# Altium PCB LKS_Motor_0313.PcbDoc (part 4 of 4)
Units mil, origin at the board's own origin, x right, y up, seen from the top; angles counter-clockwise.
Board outline 4321.51 x 591.52 mil, 2 copper layers (Top Layer, Bottom Layer); 107 components, 73 nets, 326 pads, 213 vias.
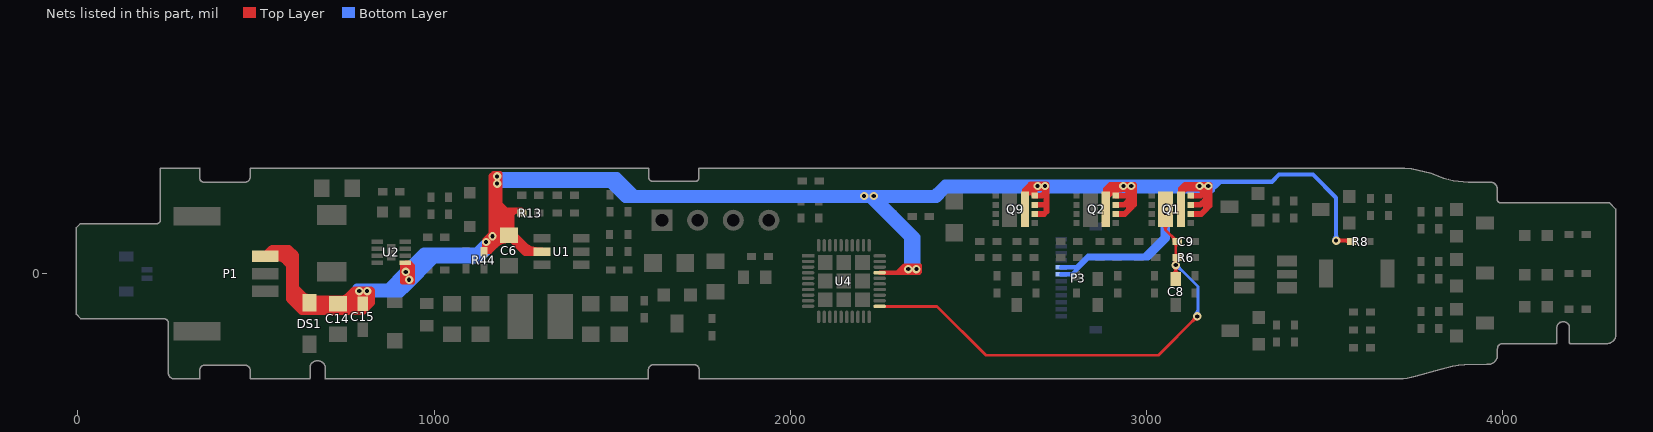
[diagram p4: the nets of this part, all layers, seen from the top]

## Via types
v1: diameter 25, hole 15, Top Layer to Bottom Layer, tented both sides, 139 vias
v2: diameter 23.62, hole 11.81, Top Layer to Bottom Layer, 74 vias

## Nets (pads, with @x,y where several pads share a name; then routed paths per layer and width w, separated by ;. In a path a pad name is that pad's centre, name@x,y a point inside that pad or via, vN(x,y) a via of type N, cw(c..) or ccw(c..) an arc to the next point about the centre after c; other vN are vias at no path point) (continued)
VBAT_8V4: C6.2 C14.2 C15.2 DS1.1 P1.1 Q1.2 Q1.3 Q1.4 Q1.9 Q2.2 Q2.3 Q2.4 Q2.9 Q9.2 Q9.3 Q9.4 Q9.9 R8.2 R13.1 R44.1 U1.5 U2.5 U4.27 | length 29490.6
  Top Layer w11.81: U2.5@919.37,29.37 U2.5@919.37,30.47 ; v2(920.37,5) 919.37,6 U2.5@919.37,30.47 ; v2(930,-17) 928,-15 911,-15 ; v2@1151.94,85.94 v2@1164,98 ; v2@1153.5,107.5 1159,113 1159,275 1164,280 ; v2@1161.28,95.28 v2@1169.5,103.5 ; v2@1169.5,112 1169.5,111.5 1140,82 R44.1@1140,61.56 ; 1169.5,118 1164,118 1140,94 R44.1@1140,74 ; v2(1177,273) 1177,111 v2@1169.5,103.5 ; 1181.63,201.37 1191,192 ; v2@1181.63,265.63 1181.63,232 ; v2@1181.63,268.37 1181.63,232 ; 1191,178 1186,183 1186,282 ; C6.2@1200,116.63 1200,162 1218,180 ; C6.2@1200,123 1192,131 1192,154 ; C6.2@1210,107.49 1203.49,107.49 1157.56,61.56 R44.1@1140,61.56 ; C6.2@1224.37,115.63 1220,120 1220,166 ; U4.27@2250.79,2.76 2310.76,2.76 ; 2298,3 2298,2.76 2299.76,2.76 2320,23 ; v2@2331,23 2319,11 ; 2345,23 v2@2337,15 ; Q1.4@3124,218.83 3151.83,218.83 ; v2(3532,93) 3573,93 R8.2@3576,90 ; 911,-24 ccw(c911,-9.47) 924.51,-14.82 cw(c911,-9.47) 911,-24 ; 911,-24 911,-15 ; 911,-24 941,-24 941,22 ; 911,-15 cw(c911,-35.88) 925.81,-21.16 ccw(c911,-35.88) 911,-15 ; 911,-15 911,-7 ; 911,-7 cw(c911,-20.39) v2@924.19,-18.04 ; 911,-7 cw(c911,-20.39) v2@924.19,-18.04 ; 911,-7 cw(c911,-20.39) v2@924.19,-18.04 ; 911,-7 cw(c911,-20.39) v2@924.19,-18.04 ; 911,-7 cw(c911,-20.39) v2@924.19,-18.04 ; 911,-7 cw(c911,-20.39) v2@924.19,-18.04 ; 911,-7 941,-7 ; 911,-7 911,22.1 ; 911,-7 v2@930,-7 ; 911,-7 v2@930,-7 ; 911,22.1 ccw(c922.31,22.1) 921.03,10.87 cw(c922.31,22.1) 911,22.1 ; 911,22.1 U2.5@919.37,30.47 ; U2.5@919.37,30.47 932.53,30.47 941,22 ; U2.5@919.37,30.47 930,19.84 v2@930,-7 ; v2@925.96,-12.69 ccw(c893.47,22) 941,22 ; v2@925.96,-12.69 ccw(c893.47,22) 941,22 ; v2@925.96,-12.69 ccw(c893.47,22) 941,22 ; v2@925.96,-12.69 ccw(c893.47,22) 941,22 ; 930,-2.74 ccw(c944.26,-2.74) 934.18,-12.82 cw(c944.26,-2.74) 930,-2.74 ; 930,-2.74 cw(c915.74,-2.74) 925.82,-12.82 ccw(c915.74,-2.74) 930,-2.74 ; v2@934.04,-21.31 ccw(c918.99,-5.25) 941,-5.25 ; v2@934.04,-21.31 ccw(c918.99,-5.25) 941,-5.25 ; v2@934.04,-21.31 ccw(c918.99,-5.25) 941,-5.25 ; v2@934.04,-21.31 ccw(c918.99,-5.25) 941,-5.25 ; 941,-7 cw(c941,7.93) 926.22,5.83 ccw(c941,7.93) 941,-7 ; 941,-7 941,22 ; R44.1@1140,61.56 1149.74,71.3 R44.1@1149.74,74 ; R44.1@1140,74 1181.63,115.63 ; R44.1@1140,74 R44.1@1149.74,74 ; v2@1146,94.91 ccw(c1146,111.58) 1157.79,99.79 cw(c1146,111.58) v2@1146,94.91 ; v2@1146,94.91 ccw(c1146,130.89) 1171.45,105.45 cw(c1146,130.89) v2@1146,94.91 ; R44.1@1149.74,74 1155,74 ; v2@1151.91,89 cw(c1192.72,89) 1163.86,117.86 ccw(c1192.72,89) v2@1151.91,89 ; v2@1151.91,89 cw(c1163.75,89) 1155.37,97.37 ccw(c1163.75,89) v2@1151.91,89 ; 1155,74 ccw(c1155,63.02) 1144.07,64.14 cw(c1155,63.02) 1155,74 ; 1155,74 cw(c1141.9,87.1) 1140.34,68.64 ccw(c1141.9,87.1) 1155,74 ; 1155,74 C6.2@1191.37,110.37 ; v2@1158.09,105 cw(c1146.25,105) 1154.63,96.63 ccw(c1146.25,105) v2@1158.09,105 ; v2@1158.09,105 cw(c1126.94,105) 1148.97,82.97 ccw(c1126.94,105) v2@1158.09,105 ; v2@1159.82,109.18 ccw(c1149.74,119.26) 1164,119.26 ; v2@1159.82,109.18 ccw(c1136.46,132.54) 1169.5,132.54 cw(c1136.46,132.54) v2@1159.82,109.18 ; v2@1159.82,109.18 ccw(c1118.36,150.64) 1177,150.64 cw(c1118.36,150.64) v2@1159.82,109.18 ; v2@1159.82,109.18 ccw(c1149.74,119.26) 1164,119.26 ; v2@1164,98 cw(c1153.33,108.66) 1148.06,94.53 ccw(c1153.33,108.66) v2@1164,98 ; v2@1164,98 1164,271 ; 1164,119.26 ccw(c1178.26,119.26) v2@1168.18,109.18 ; 1164,119.26 ccw(c1178.26,119.26) v2@1168.18,109.18 ; 1164,271 1164,280 ; 1164,271 v2@1175,282 ; 1164,271 v2@1175,282 ; 1164,280 1166,282 v2@1175,282 ; v2@1168.18,109.18 cw(c1190.33,131.33) 1159,131.33 ccw(c1190.33,131.33) v2@1168.18,109.18 ; v2@1169.5,103.5 cw(c1148.53,124.46) 1146.42,94.89 ccw(c1148.53,124.46) v2@1169.5,103.5 ; v2@1169.5,103.5 v2@1169.5,276.5 ; v2@1169.5,276.5 ccw(c1190.89,276.5) 1180.01,258.08 cw(c1190.89,276.5) v2@1169.5,276.5 ; v2@1169.5,276.5 v2@1175,282 ; v2@1172.82,248.82 cw(c1162.74,238.74) 1177,238.74 ; v2@1172.82,248.82 cw(c1141.01,217.01) 1186,217.01 ccw(c1141.01,217.01) v2@1172.82,248.82 ; v2@1172.82,248.82 cw(c1162.74,238.74) 1177,238.74 ; v2@1172.82,257.18 ccw(c1194.13,235.87) 1164,235.87 cw(c1194.13,235.87) v2@1172.82,257.18 ; v2@1172.82,257.18 ccw(c1162.74,267.26) v2@1177,267.26 ; v2@1172.82,257.18 ccw(c1162.74,267.26) v2@1177,267.26 ; v2@1172.82,268.82 cw(c1151.57,247.57) v2@1181.63,247.57 ; v2@1172.82,268.82 cw(c1151.57,247.57) v2@1181.63,247.57 ; v2@1172.82,268.82 cw(c1162.74,258.74) v2@1177,258.74 ; v2@1172.82,268.82 cw(c1141.01,237.01) 1186,237.01 ccw(c1141.01,237.01) v2@1172.82,268.82 ; v2@1172.82,268.82 cw(c1151.57,247.57) v2@1181.63,247.57 ; v2@1172.82,268.82 cw(c1151.57,247.57) v2@1181.63,247.57 ; v2@1172.82,268.82 cw(c1162.74,258.74) v2@1177,258.74 ; v2@1173.38,248.33 cw(c1160.32,231.5) 1181.63,231.5 ; v2@1173.38,248.33 cw(c1160.32,231.5) 1181.63,231.5 ; v2@1173.38,248.33 cw(c1160.32,231.5) 1181.63,231.5 ; v2@1173.38,248.33 cw(c1160.32,231.5) 1181.63,231.5 ; v2@1175,282 1186,282 ; 1177,238.74 cw(c1191.26,238.74) v2@1181.18,248.82 ; 1177,238.74 cw(c1191.26,238.74) v2@1181.18,248.82 ; v2@1177,258.74 cw(c1191.26,258.74) v2@1181.18,268.82 ; v2@1177,258.74 cw(c1191.26,258.74) v2@1181.18,268.82 ; v2@1177,267.26 ccw(c1191.26,267.26) 1181.18,257.18 cw(c1191.26,267.26) v2@1177,267.26 ; v2@1181.18,248.82 ccw(c1222.64,207.36) 1164,207.36 cw(c1222.64,207.36) v2@1181.18,248.82 ; v2@1181.18,248.82 ccw(c1209.36,220.64) 1169.5,220.64 cw(c1209.36,220.64) v2@1181.18,248.82 ; v2@1181.18,268.82 ccw(c1222.64,227.36) 1164,227.36 cw(c1222.64,227.36) v2@1181.18,268.82 ; v2@1181.18,268.82 ccw(c1209.36,240.64) 1169.5,240.64 cw(c1209.36,240.64) v2@1181.18,268.82 ; 1181.63,115.63 cw(c1181.63,106.33) 1190.92,106.76 ccw(c1181.63,106.33) 1181.63,115.63 ; 1181.63,115.63 cw(c1168.96,128.3) 1165.23,110.78 ccw(c1168.96,128.3) 1181.63,115.63 ; 1181.63,115.63 1181.63,232 ; 1181.63,115.63 1186,120 1186,148 ; 1181.63,115.63 1210,115.63 1210,172 ; 1186,148 ccw(c1210.99,148) 1208.33,123.15 cw(c1210.99,148) 1186,148 ; 1186,148 1186,163 1203,180 ; 1186,148 1192,154 ; 1186,282 cw(c1156.24,282) 1173.56,257.8 ccw(c1156.24,282) 1186,282 ; 1191,192 1191,155 1192,154 ; 1191,192 1203,180 ; C6.2@1191.37,110.37 cw(c1153.04,148.7) 1146.69,94.86 ccw(c1153.04,148.7) C6.2@1191.37,110.37 ; C6.2@1191.37,110.37 cw(c1179.13,122.61) 1167.85,109.48 ccw(c1179.13,122.61) C6.2@1191.37,110.37 ; 1192,154 ccw(c1227.02,154) 1212.97,121.92 cw(c1227.02,154) 1192,154 ; 1192,154 1210,172 ; C6.2@1198.86,118.63 ccw(c1171.98,145.51) 1210,145.51 ; C6.2@1198.86,118.63 ccw(c1171.98,145.51) 1210,145.51 ; C6.2@1198.86,118.63 ccw(c1171.98,145.51) 1210,145.51 ; C6.2@1198.86,118.63 ccw(c1171.98,145.51) 1210,145.51 ; 1203,180 1218,180 ; C6.2@1206.64,103.56 ccw(c1206.39,14.62) 1143.51,77.51 cw(c1206.39,14.62) C6.2@1206.64,103.56 ; C6.2@1206.65,103.56 ccw(c1206.65,50.2) 1168.93,87.93 cw(c1206.65,50.2) C6.2@1206.65,103.56 ; C6.2@1209.44,110.28 cw(c1276.57,177.41) 1181.63,177.41 ccw(c1276.57,177.41) C6.2@1209.44,110.28 ; C6.2@1209.44,110.28 cw(c1232.22,133.06) 1200,133.06 ccw(c1232.22,133.06) C6.2@1209.44,110.28 ; 1210,133 ccw(c1222.78,133) 1217.06,121.57 cw(c1222.78,133) 1210,133 ; 1210,133 cw(c1197.22,133) 1202.94,121.57 ccw(c1197.22,133) 1210,133 ; 1210,133 1210,156 1220,166 ; 1210,145.51 ccw(c1248.02,145.51) C6.2@1221.14,118.63 ; 1210,145.51 ccw(c1248.02,145.51) C6.2@1221.14,118.63 ; 1210,145.51 ccw(c1248.02,145.51) C6.2@1221.14,118.63 ; 1210,145.51 ccw(c1248.02,145.51) C6.2@1221.14,118.63 ; 1210,172 1218,180 ; C6.2@1217.79,118.63 cw(c1305.08,205.92) 1181.63,205.92 ccw(c1305.08,205.92) C6.2@1217.79,118.63 ; C6.2@1217.79,118.63 cw(c1260.74,161.57) 1200,161.57 ccw(c1260.74,161.57) C6.2@1217.79,118.63 ; 1218,180 cw(c1218,154.88) 1239.5,167.88 ccw(c1218,154.88) 1218,180 ; 1218,180 1246,180 1234,180 1220,166 ; 2310.76,2.76 ccw(c2310.76,17.61) 2325.24,14.31 cw(c2310.76,17.61) 2310.76,2.76 ; 2310.76,2.76 2319,11 ; 2310.76,2.76 2324.76,2.76 ; 2319,11 2353.51,11 2361.76,2.76 ; 2320,23 cw(c2320,-15.38) 2349.47,9.22 ccw(c2320,-15.38) 2320,23 ; 2320,23 2364,23 ; 2324.76,2.76 ccw(c2324.76,31.4) 2349,16.15 cw(c2324.76,31.4) 2324.76,2.76 ; 2324.76,2.76 2361.76,2.76 ; 2324.76,2.76 v2@2337,15 ; v2@2337,15 cw(c2337,-1.32) 2349.48,9.19 ccw(c2337,-1.32) v2@2337,15 ; v2@2337,15 2356,15 2364,23 ; v2@2337.88,15.88 cw(c2348.83,4.93) v2@2357.18,17.97 ; v2@2337.88,15.88 cw(c2348.83,4.93) v2@2357.18,17.97 ; v2@2337.88,15.88 cw(c2348.83,4.93) v2@2357.18,17.97 ; v2@2337.88,15.88 cw(c2348.83,4.93) v2@2357.18,17.97 ; 2361.75,2.76 cw(c2361.75,34.21) 2335.86,16.35 ccw(c2361.75,34.21) 2361.75,2.76 ; 2361.76,2.76 2364,5 ; 2361.76,2.76 2364,5 ; 2364,5 2364,23 ; 2364,23 ccw(c2364,-13.28) 2335.62,9.32 cw(c2364,-13.28) 2364,23 ; 3546.26,93 ccw(c3546.26,78.74) 3536.18,88.82 cw(c3546.26,78.74) 3546.26,93 ; 3546.26,93 cw(c3546.26,107.26) 3536.18,97.18 ccw(c3546.26,107.26) 3546.26,93 ; 911,-17.09 cw(c928.7,-17.09) 922.45,-0.53 ccw(c928.7,-17.09) 911,-17.09 ; v2@914.52,4.17 ccw(c927.39,6) 927.39,-7 cw(c927.39,6) v2@914.52,4.17 ; v2@916.19,9.18 ccw(c908.53,16.84) 919.37,16.84 cw(c908.53,16.84) v2@916.19,9.18 ; 919.37,21.67 ccw(c937.04,21.67) 924.55,9.18 cw(c937.04,21.67) 919.37,21.67 ; U2.5@920.1,29.75 cw(c902.18,11.83) 925.9,2.92 ccw(c902.18,11.83) U2.5@920.1,29.75 ; U2.5@929.21,30.47 cw(c929.21,22.47) 934.87,28.13 ccw(c929.21,22.47) U2.5@929.21,30.47 ; R44.1@1140,60.91 cw(c1173.18,60.91) 1150.11,84.76 ccw(c1173.18,60.91) R44.1@1140,60.91 ; R44.1@1140,68.65 ccw(c1140,91.96) 1156.48,75.48 cw(c1140,91.96) R44.1@1140,68.65 ; v2@1142.71,84.1 cw(c1133.86,70.91) 1149.74,70.91 ccw(c1133.86,70.91) v2@1142.71,84.1 ; R44.1@1144.09,64.56 cw(c1176.77,64.56) 1153.67,87.67 ccw(c1176.77,64.56) R44.1@1144.09,64.56 ; v2@1145.31,83.14 ccw(c1149.4,117.88) 1174.14,93.14 cw(c1149.4,117.88) v2@1145.31,83.14 ; v2@1152.21,94.21 cw(c1164,82.42) 1164,99.09 ccw(c1164,82.42) v2@1152.21,94.21 ; v2@1152.46,91.56 ccw(c1162.48,103.23) 1173.35,92.35 cw(c1162.48,103.23) v2@1152.46,91.56 ; v2@1155.44,89.44 ccw(c1146.3,98.58) 1158.45,102.99 cw(c1146.3,98.58) v2@1155.44,89.44 ; 1159.6,275.6 cw(c1171.39,263.82) 1180.08,278.04 ccw(c1171.39,263.82) 1159.6,275.6 ; v2@1160.15,100.52 ccw(c1170.8,112.92) 1182.36,101.36 cw(c1170.8,112.92) v2@1160.15,100.52 ; v2@1163.59,97.59 cw(c1206.51,54.67) 1206.68,115.37 ccw(c1206.51,54.67) v2@1163.59,97.59 ; 1164,255.87 cw(c1194.13,255.87) 1172.82,277.18 ccw(c1194.13,255.87) 1164,255.87 ; 1164,264.39 cw(c1165.61,264.39) 1164.47,265.53 ccw(c1165.61,264.39) 1164,264.39 ; v2@1168.18,100.82 ccw(c1146.87,122.13) 1177,122.13 cw(c1146.87,122.13) v2@1168.18,100.82 ; 1174.37,78.37 cw(c1206.65,46.09) 1206.65,91.74 ccw(c1206.65,46.09) 1174.37,78.37 ; 1181.63,120.38 ccw(c1219.54,120.38) 1192.73,93.57 cw(c1219.54,120.38) 1181.63,120.38 ; 1181.63,148.89 ccw(c1248.06,148.89) 1201.09,101.92 cw(c1248.06,148.89) 1181.63,148.89 ; 1182.01,86.01 ccw(c1160.52,107.49) 1190.91,107.49 cw(c1160.52,107.49) 1182.01,86.01 ; 1183.67,117.67 cw(c1206.62,94.73) 1206.71,127.18 ccw(c1206.62,94.73) 1183.67,117.67 ; C6.2@1186,121.71 ccw(c1208.18,121.71) 1205.82,99.66 cw(c1208.18,121.71) C6.2@1186,121.71 ; 1186,134.86 ccw(c1209.58,134.86) 1207.07,111.41 cw(c1209.58,134.86) 1186,134.86 ; 1192,135.93 ccw(c1219.11,135.93) 1208.23,111.1 cw(c1219.11,135.93) 1192,135.93 ; C6.2@1194.89,128.11 ccw(c1206.65,139.88) 1206.65,123.24 cw(c1206.65,139.88) C6.2@1194.89,128.11 ; C6.2@1195.52,118.63 ccw(c1184.7,129.45) 1200,129.45 cw(c1184.7,129.45) C6.2@1195.52,118.63 ; C6.2@1202.21,118.63 ccw(c1159.26,161.57) 1220,161.57 cw(c1159.26,161.57) C6.2@1202.21,118.63 ; C6.2@1210.56,110.28 ccw(c1187.78,133.06) 1220,133.06 cw(c1187.78,133.06) C6.2@1210.56,110.28 ; 1220,129.45 ccw(c1235.3,129.45) 1224.48,118.63 cw(c1235.3,129.45) 1220,129.45 ; 1226,172 cw(c1240.44,157.56) 1244.56,177.56 ccw(c1240.44,157.56) 1226,172 ; R13.1@1238.95,180 cw(c1238.95,167.55) 1249.6,173.99 ccw(c1238.95,167.55) R13.1@1238.95,180 ; 2307.04,10.04 cw(c2328.71,-11.63) 2331.55,18.88 ccw(c2328.71,-11.63) 2307.04,10.04 ; v2@2326.14,9.65 ccw(c2339.26,18.7) 2339.26,2.76 cw(c2339.26,18.7) v2@2326.14,9.65 ; v2@2326.38,16.68 cw(c2339.49,6.24) 2339.49,23 ccw(c2339.49,6.24) v2@2326.38,16.68 ; v2@2327.5,5.5 cw(c2340.73,-7.73) 2350.82,8.03 ccw(c2340.73,-7.73) v2@2327.5,5.5 ; v2@2333.12,11.12 cw(c2352.12,-7.89) 2354.53,18.88 ccw(c2352.12,-7.89) v2@2333.12,11.12 ; v2@2334.91,11 ccw(c2334.91,32.09) 2349.82,17.18 cw(c2334.91,32.09) v2@2334.91,11 ; v2@2335.18,8.82 cw(c2350.09,-6.09) 2350.09,15 ccw(c2350.09,-6.09) v2@2335.18,8.82 ; v2@2335.18,17.18 ccw(c2350.09,32.09) 2350.09,11 cw(c2350.09,32.09) v2@2335.18,17.18 ; 2345.25,23 cw(c2345.25,5.69) 2358.53,16.78 ccw(c2345.25,5.69) 2345.25,23 ; 2346.14,2.76 ccw(c2346.14,17.94) 2359,9.85 cw(c2346.14,17.94) 2346.14,2.76 ; 3555.87,93 cw(c3555.87,72.87) 3570.1,87.1 ccw(c3555.87,72.87) 3555.87,93
  Top Layer w15.75: Q9.9@2658.5,180.4 2658.5,234.5 2669.5,245.5 ; Q9.2@2686,167.65 2712.65,167.65 2719,174 2719,250 v2(2715,246) ; Q9.3@2686,193.24 2710.24,193.24 ; v2@2686,244 2686,235 ; v2@2694.5,245.5 2669.5,245.5 ; v2@2719,250.24 2680,250.24 ; Q2.9@2885.5,180.4 2885.5,236.5 ; 2898,249 2965,249 2965,194 2957,186 ; 2900,247 2896,247 2895,246 ; Q2.2@2913,167.65 2938.65,167.65 2957,186 ; Q2.3@2913,193.24 2937.24,193.24 2957,213 ; Q2.4@2913,218.83 2942.83,218.83 2957,233 ; v2@2947,243 2957,233 ; 2950.8,179.8 2950.8,196.2 ; 2965,237 2964.5,236.5 ; Q1.9@3096.5,180.4 3096.5,226 3109,238.5 ; Q1.9@3096.5,184.33 3096.5,238.5 ; Q1.2@3124,167.65 3153.65,167.65 3157.59,171.59 3167,181 ; Q1.3@3124,193.24 3151.24,193.24 3155.18,197.18 3167,209 v2@3167,243 ; Q1.4@3124,218.83 3151.83,218.83 3167,234 3155.77,222.77 ; 3124,250 v2@3177,250 ; 3167,220 3167,181 ; 2659,235 cw(c2659,206.32) 2684.93,218.57 ccw(c2659,206.32) 2659,235 ; 2659,235 ccw(c2659,279.53) 2691.16,248.72 cw(c2659,279.53) 2659,235 ; 2659,235 2686,235 ; 2669.5,245.5 ccw(c2689.17,225.83) 2662.04,219.7 cw(c2689.17,225.83) 2669.5,245.5 ; 2669.5,245.5 2674.24,250.24 ; 2674.25,250.24 cw(c2674.25,226.25) 2691.22,243.22 ccw(c2674.25,226.25) 2674.25,250.24 ; 2674.24,250.24 2680,250.24 ; 2677,250.24 cw(c2677,232.43) 2690.92,243.54 ccw(c2677,232.43) 2677,250.24 ; 2677,250.24 2680,250.24 ; 2678,240 ccw(c2678,253.91) 2690.47,247.75 cw(c2678,253.91) 2678,240 ; 2678,240 v2@2715,240 ; 2686,235 ccw(c2686,209.6) 2661.93,217.73 cw(c2686,209.6) 2686,235 ; 2686,235 Q9.4@2686,218.83 2705.83,218.83 2715,228 v2@2715,240 ; v2@2712.22,243.22 cw(c2695.84,226.84) 2719,226.84 ccw(c2695.84,226.84) v2@2712.22,243.22 ; v2@2712.22,243.22 ccw(c2695.25,226.25) 2695.25,250.24 cw(c2695.25,226.25) v2@2712.22,243.22 ; v2@2715,240 cw(c2715,263.22) 2697.04,248.5 ccw(c2715,263.22) v2@2715,240 ; 2885.5,236.5 2964.5,236.5 ; 2885.5,236.5 2892,243 ; 2885.5,236.5 2895,246 ; 2892,243 ccw(c2905.42,229.58) 2888.7,220.61 cw(c2905.42,229.58) 2892,243 ; 2895,246 ccw(c2912.85,228.15) 2888.93,220.06 cw(c2912.85,228.15) 2895,246 ; v2@2954.22,243.22 cw(c2928.18,217.18) 2965,217.18 ccw(c2928.18,217.18) v2@2954.22,243.22 ; v2@2954.22,243.22 ccw(c2940.25,229.25) 2940.25,249 cw(c2940.25,229.25) v2@2954.22,243.22 ; 2957,186 2957,233 ; 2964.5,236.5 cw(c2964.5,271.66) 2937.97,248.58 ccw(c2964.5,271.66) 2964.5,236.5 ; 3096.5,238.5 v2@3172.5,238.5 ; 3096.5,238.5 3108,250 v2@3177,250 ; 3129.84,250 cw(c3129.84,226.84) v2@3146.22,243.22 ; 3129.84,250 cw(c3129.84,226.84) v2@3146.22,243.22 ; 3129.84,250 cw(c3129.84,226.84) v2@3146.22,243.22 ; 3129.84,250 cw(c3129.84,226.84) v2@3146.22,243.22 ; v2@3151.78,243.22 cw(c3168.16,226.84) v2@3168.16,250 ; v2@3151.78,243.22 cw(c3168.16,226.84) v2@3168.16,250 ; v2@3151.78,243.22 cw(c3168.16,226.84) v2@3168.16,250 ; v2@3151.78,243.22 cw(c3168.16,226.84) v2@3168.16,250 ; v2@3153.84,250 cw(c3153.84,226.84) v2@3170.22,243.22 ; v2@3153.84,250 cw(c3153.84,226.84) v2@3170.22,243.22 ; v2@3153.84,250 cw(c3153.84,226.84) v2@3170.22,243.22 ; v2@3153.84,250 cw(c3153.84,226.84) v2@3170.22,243.22 ; 3162.04,229.04 ccw(c3145.07,246) v2@3169.06,246 ; 3162.04,229.04 ccw(c3145.07,246) v2@3169.06,246 ; 3162.04,229.04 ccw(c3145.07,246) v2@3169.06,246 ; 3162.04,229.04 ccw(c3145.07,246) v2@3169.06,246 ; 3167,181 3177,191 3177,234 ; v2@3170.22,243.22 cw(c3153.84,226.84) 3177,226.84 ccw(c3153.84,226.84) v2@3170.22,243.22 ; v2@3172.5,238.5 cw(c3172.5,264.42) 3152.1,248.43 ccw(c3172.5,264.42) v2@3172.5,238.5 ; v2@3172.5,238.5 3177,234 ; 3177,234 v2@3177,250 ; v2@2691.01,240 ccw(c2691.01,269.99) 2712.22,248.78 cw(c2691.01,269.99) v2@2691.01,240 ; v2@2696.78,243.22 cw(c2713.75,226.25) 2713.75,250.24 ccw(c2713.75,226.25) v2@2696.78,243.22 ; Q2.9@2888.06,216.33 cw(c2936.75,167.64) 2936.75,236.5 ccw(c2936.75,167.64) Q2.9@2888.06,216.33 ; 2902.56,236.5 ccw(c2902.56,278.44) 2932.22,248.78 cw(c2902.56,278.44) 2902.56,236.5 ; 2918.25,249 cw(c2918.25,229.25) 2932.22,243.22 ccw(c2918.25,229.25) 2918.25,249 ; 2924.56,236.5 ccw(c2924.56,278.44) 2954.22,248.78 cw(c2924.56,278.44) 2924.56,236.5 ; v2@2935,242.06 cw(c2935,210.83) 2957.08,232.92 ccw(c2935,210.83) v2@2935,242.06 ; v2@2937.78,243.22 cw(c2951.75,229.25) 2951.75,249 ccw(c2951.75,229.25) v2@2937.78,243.22 ; 2949.33,225.33 ccw(c2936.67,238) 2953.34,244.56 cw(c2936.67,238) 2949.33,225.33 ; 3121.39,238.5 ccw(c3121.39,273.61) 3146.22,248.78 cw(c3121.39,273.61) 3121.39,238.5 ; v2@3145.39,238.5 ccw(c3145.39,273.61) 3170.22,248.78 cw(c3145.39,273.61) v2@3145.39,238.5 ; v2@3146.81,242.73 cw(c3121.38,204.86) 3167,204.86 ccw(c3121.38,204.86) v2@3146.81,242.73 ; 3167,222.01 cw(c3196.99,222.01) 3175.78,243.22 ccw(c3196.99,222.01) 3167,222.01
  Top Layer w23.62: 609,-40 609,-5 ; 609,-20.93 609,-5 ; DS1.1@630.93,-61.93 596,-27 ; DS1.1@650.57,-73.5 800,-73.5 C15.2@800,-103.5 ; C14.2@730,-84.37 740.63,-84.37 777,-48 v2@822,-48 ; 782,-73.5 793.5,-62 ; C6.2@1210,107.49 1255.49,62 U1.5@1302.88,62 1268,62 1232.5,97.5 C6.2@1224.37,105.63 ; P1.1@525.97,49.22 571.79,49.22 596,25 596,-27 ; P1.1@525.97,49.22 589.79,49.22 609,30 ; P1.1@525.97,49.22 545.75,69 592,69 609,52 609,30 ; 596,-48 596,-71 628.5,-103.5 C15.2@800,-103.5 ; 596,-48 596,-27 ; 596,-48 638,-90 760,-90 ; 609,-5 609,30 ; DS1.1@655.57,-81.28 ccw(c676.61,-60.24) 676.61,-90 cw(c676.61,-60.24) DS1.1@655.57,-81.28 ; DS1.1@655.57,-81.28 ccw(c709.21,-27.65) 709.21,-103.5 cw(c709.21,-27.65) DS1.1@655.57,-81.28 ; C14.2@719.69,-77.41 cw(c689.3,-47.02) 689.3,-90 ccw(c689.3,-47.02) C14.2@719.69,-77.41 ; C14.2@719.69,-77.41 cw(c656.71,-14.42) 656.71,-103.5 ccw(c656.71,-14.42) C14.2@719.69,-77.41 ; C14.2@741.89,-79.49 ccw(c760,-69.15) 760,-90 ; C14.2@741.89,-79.49 ccw(c760,-69.15) 760,-90 ; C14.2@741.89,-79.49 ccw(c760,-69.15) 760,-90 ; C14.2@741.89,-79.49 ccw(c760,-69.15) 760,-90 ; 757,-73.5 ccw(c757,-87.52) 743.1,-85.67 cw(c757,-87.52) 757,-73.5 ; 757,-73.5 760.5,-73.5 ; 760,-90 782,-68 ; 760,-90 786.5,-90 C15.2@800,-103.5 ; 760.5,-73.5 ccw(c760.5,-91.81) 742.84,-86.97 cw(c760.5,-91.81) 760.5,-73.5 ; 782,-68 cw(c754.53,-40.53) 737.63,-75.51 ccw(c754.53,-40.53) 782,-68 ; v2(790,-49) ccw(c790,-82.8) 766.1,-58.9 cw(c790,-82.8) v2(790,-49) ; v2(790,-49) ccw(c821.38,-17.62) 821.38,-62 cw(c821.38,-17.62) v2(790,-49) ; v2(790,-49) cw(c763.44,-49) 782.22,-67.78 ccw(c763.44,-49) v2(790,-49) ; 793.5,-62 ccw(c793.5,-42.34) v2(812,-49) ; 793.5,-62 ccw(c793.5,-42.34) v2(812,-49) ; 793.5,-62 822,-62 ; C15.2@800,-103.5 cw(c800,-22.19) 740.54,-77.66 ccw(c800,-22.19) C15.2@800,-103.5 ; C15.2@800,-103.5 806,-97.5 815,-88.5 822,-81.5 822,-62 ; v2(812,-49) cw(c787.86,-73.14) 822,-73.14 ccw(c787.86,-73.14) v2(812,-49) ; 822,-62 ccw(c822,-80.85) 803.18,-79.74 cw(c822,-80.85) 822,-62 ; 822,-62 v2@822,-48 ; v2@822,-48 cw(c792.84,-48) 799.29,-76.44 ccw(c792.84,-48) v2@822,-48 ; P1.1@548.85,45.48 cw(c559.58,12.84) 583.87,37.13 ccw(c559.58,12.84) P1.1@548.85,45.48 ; 608.5,-60.5 ccw(c635.25,-33.74) 647.46,-69.55 cw(c635.25,-33.74) 608.5,-60.5 ; 629.74,-60.74 ccw(c650,-40.49) 650,-69.13 cw(c650,-40.49) 629.74,-60.74 ; DS1.1@655.57,-82.58 cw(c677.48,-104.49) 677.48,-73.5 ccw(c677.48,-104.49) DS1.1@655.57,-82.58 ; 676.65,-73.5 cw(c676.65,-134.37) 719.69,-91.33 ccw(c676.65,-134.37) 676.65,-73.5 ; C14.2@713.74,-103.5 ccw(c713.74,-71.45) 736.4,-94.11 cw(c713.74,-71.45) C14.2@713.74,-103.5 ; C14.2@723.27,-93.77 ccw(c745.65,-72.89) 745.65,-103.5 cw(c745.65,-72.89) C14.2@723.27,-93.77 ; C14.2@727.35,-96.78 ccw(c739.21,-72.23) 758.49,-91.51 cw(c739.21,-72.23) C14.2@727.35,-96.78 ; C14.2@733.35,-74.53 ccw(c733.35,-33.18) 762.58,-62.42 cw(c733.35,-33.18) C14.2@733.35,-74.53 ; C14.2@740.31,-91.33 cw(c783.35,-134.37) 783.35,-73.5 ccw(c783.35,-134.37) C14.2@740.31,-91.33 ; C14.2@740.31,-77.41 ccw(c770.7,-47.02) 770.7,-90 cw(c770.7,-47.02) C14.2@740.31,-77.41 ; 758.62,-103.5 ccw(c758.62,-48.16) 797.75,-87.29 cw(c758.62,-48.16) 758.62,-103.5 ; 767.23,-82.77 cw(c783,-98.55) 797.87,-81.92 ccw(c783,-98.55) 767.23,-82.77 ; 770.56,-79.44 cw(c796.45,-105.33) 804.49,-69.61 ccw(c796.45,-105.33) 770.56,-79.44 ; 777.7,-73.5 cw(c777.7,-101.84) 797.75,-81.8 ccw(c777.7,-101.84) 777.7,-73.5 ; C6.2@1213.35,97.65 cw(c1213.35,51.77) 1245.79,84.21 ccw(c1213.35,51.77) C6.2@1213.35,97.65 ; C6.2@1223.19,107.49 ccw(c1255.03,107.49) 1232.52,84.98 cw(c1255.03,107.49) C6.2@1223.19,107.49 ; 1251.69,78.31 ccw(c1291.07,117.7) 1291.07,62 cw(c1291.07,117.7) 1251.69,78.31
  Bottom Layer w11.81: 2434,233 2436,231 3180,231 ; 3167,258 3217,258 ; v2@3168.82,250.18 cw(c3187.71,231.29) 3187.71,258 ccw(c3187.71,231.29) v2@3168.82,250.18 ; v2@3168.82,250.18 cw(c3122.53,296.47) 3122.53,231 ccw(c3122.53,296.47) v2@3168.82,250.18 ; v2@3177.18,241.82 cw(c3216.23,202.77) 3216.23,258 ccw(c3216.23,202.77) v2@3177.18,241.82 ; v2@3177.18,241.82 cw(c3151.04,267.96) 3151.04,231 ccw(c3151.04,267.96) v2@3177.18,241.82 ; 3180,231 cw(c3180,258.53) 3154.48,248.21 ccw(c3180,258.53) 3180,231 ; 3180,231 3207,258 ; 3207,258 cw(c3186.16,278.84) 3175.2,251.48 ccw(c3186.16,278.84) 3207,258 ; 3207,258 3217,258 ; 3217,258 3352,258 3372,278 3467,278 3532,213 3532,130 ; v2@3527.82,97.18 ccw(c3517.74,107.26) 3532,107.26 ; v2@3527.82,97.18 ccw(c3517.74,107.26) 3532,107.26 ; v2@3527.82,97.18 ccw(c3517.74,107.26) 3532,107.26 ; v2@3527.82,97.18 ccw(c3517.74,107.26) 3532,107.26 ; 3532,107.26 ccw(c3546.26,107.26) v2@3536.18,97.18 ; 3532,107.26 ccw(c3546.26,107.26) v2@3536.18,97.18 ; 3532,107.26 ccw(c3546.26,107.26) v2@3536.18,97.18 ; 3532,107.26 ccw(c3546.26,107.26) v2@3536.18,97.18 ; 3532,130 v2(3532,93) 3532,130 ; 2643.53,231 ccw(c2643.53,296.47) 2689.82,250.18 cw(c2643.53,296.47) 2643.53,231 ; 2664.53,231 ccw(c2664.53,296.47) 2710.82,250.18 cw(c2664.53,296.47) 2664.53,231 ; 2672.04,231 ccw(c2672.04,267.96) 2698.18,241.82 cw(c2672.04,267.96) 2672.04,231 ; 2681.47,233.47 ccw(c2687.44,239.44) 2687.44,231 cw(c2687.44,239.44) 2681.47,233.47 ; v2@2689.82,241.82 ccw(c2715.96,267.96) 2715.96,231 cw(c2715.96,267.96) v2@2689.82,241.82 ; 2693.04,231 ccw(c2693.04,267.96) 2719.18,241.82 cw(c2693.04,267.96) 2693.04,231 ; v2@2698.18,250.18 ccw(c2744.47,296.47) 2744.47,231 cw(c2744.47,296.47) v2@2698.18,250.18 ; 2700.56,231 ccw(c2700.56,239.44) 2706.53,233.47 cw(c2700.56,239.44) 2700.56,231 ; 2702.47,233.47 ccw(c2708.44,239.44) 2708.44,231 cw(c2708.44,239.44) 2702.47,233.47 ; v2@2710.82,241.82 ccw(c2736.96,267.96) 2736.96,231 cw(c2736.96,267.96) v2@2710.82,241.82 ; v2@2719.18,250.18 ccw(c2765.47,296.47) 2765.47,231 cw(c2765.47,296.47) v2@2719.18,250.18 ; 2721.56,231 ccw(c2721.56,239.44) 2727.53,233.47 cw(c2721.56,239.44) 2721.56,231 ; 2884.53,231 ccw(c2884.53,296.47) 2930.82,250.18 cw(c2884.53,296.47) 2884.53,231 ; 2906.53,231 ccw(c2906.53,296.47) 2952.82,250.18 cw(c2906.53,296.47) 2906.53,231 ; 2913.04,231 ccw(c2913.04,267.96) 2939.18,241.82 cw(c2913.04,267.96) 2913.04,231 ; 2922.47,233.47 ccw(c2928.44,239.44) 2928.44,231 cw(c2928.44,239.44) 2922.47,233.47 ; v2@2930.82,241.82 ccw(c2956.96,267.96) 2956.96,231 cw(c2956.96,267.96) v2@2930.82,241.82 ; 2935.04,231 ccw(c2935.04,267.96) 2961.18,241.82 cw(c2935.04,267.96) 2935.04,231 ; v2@2939.18,250.18 ccw(c2985.47,296.47) 2985.47,231 cw(c2985.47,296.47) v2@2939.18,250.18 ; 2941.56,231 ccw(c2941.56,239.44) 2947.53,233.47 cw(c2941.56,239.44) 2941.56,231 ; 2944.47,233.47 ccw(c2950.44,239.44) 2950.44,231 cw(c2950.44,239.44) 2944.47,233.47 ; v2@2952.82,241.82 ccw(c2978.96,267.96) 2978.96,231 cw(c2978.96,267.96) v2@2952.82,241.82 ; v2@2961.18,250.18 ccw(c3007.47,296.47) 3007.47,231 cw(c3007.47,296.47) v2@2961.18,250.18 ; 2963.56,231 ccw(c2963.56,239.44) 2969.53,233.47 cw(c2963.56,239.44) 2963.56,231 ; 3098.53,231 ccw(c3098.53,296.47) 3144.82,250.18 cw(c3098.53,296.47) 3098.53,231 ; 3127.04,231 ccw(c3127.04,267.96) 3153.18,241.82 cw(c3127.04,267.96) 3127.04,231 ; v2@3143.52,243.79 ccw(c3162.49,251.45) 3162.49,231 cw(c3162.49,251.45) v2@3143.52,243.79 ; 3155.56,231 ccw(c3155.56,239.44) 3161.53,233.47 cw(c3155.56,239.44) 3155.56,231 ; v2@3170.8,240.52 ccw(c3178.92,260.77) 3194.34,245.34 cw(c3178.92,260.77) v2@3170.8,240.52 ; 3179.56,231 ccw(c3179.56,239.44) 3185.53,233.47 cw(c3179.56,239.44) 3179.56,231
  Bottom Layer w23.62: 1087,47 1104,47 1119,62 ; 1190,266 1500,266 1524,242 ; 1469,253 1493,253 1536,210 1646,210 ; 1543,223 2258,223 ; 2194.93,223 cw(c2194.93,205.93) v2(2207,218) ; v2@2211,221 2331,101 v2(2331,13) ; 2219.07,223 ccw(c2219.07,205.93) v2(2207,218) ; 2221.93,223 cw(c2221.93,205.93) v2(2234,218) ; 2246,223 v2@2240,223 ; v2@3182,247 3182,243 2444,243 ; v2(790,-49) cw(c812.49,-71.49) 812.49,-39.69 ccw(c812.49,-71.49) v2(790,-49) ; v2(790,-49) ccw(c806.14,-32.86) 806.14,-55.69 cw(c806.14,-32.86) v2(790,-49) ; v2(790,-49) 870.37,-49 879.68,-39.69 ; v2(812,-49) cw(c834.49,-71.49) 834.49,-39.69 ccw(c834.49,-71.49) v2(812,-49) ; v2(812,-49) ccw(c789.51,-71.49) 789.51,-39.69 cw(c789.51,-71.49) v2(812,-49) ; v2(812,-49) ccw(c828.14,-32.86) 828.14,-55.69 cw(c828.14,-32.86) v2(812,-49) ; v2(812,-49) cw(c795.86,-32.86) 795.86,-55.69 ccw(c795.86,-32.86) v2(812,-49) ; 869,-39.69 783.31,-39.69 783.31,-55.69 883.31,-55.69 ; 869,-39.69 v2@913.69,5 ; 869,-39.69 879.68,-39.69 ; 879.68,-39.69 v2@919.37,0 ; 883.31,-55.69 906.31,-55.69 924,-38 ; 883.31,-55.69 900,-39 919.37,-19.63 v2@919.37,0 ; v2@913.69,5 970.69,62 1014,62 ; v2@913.69,5 934,5 ; v2@919.37,0 ccw(c938.28,0) v2(930,-17) ; v2@919.37,0 ccw(c938.28,0) v2(930,-17) ; v2(920.37,5) cw(c887.46,-27.91) 934,-27.91 ccw(c887.46,-27.91) v2(920.37,5) ; v2(920.37,5) ccw(c920.37,37.91) 943.64,14.64 cw(c920.37,37.91) v2(920.37,5) ; v2(920.37,5) cw(c936.51,5) 925.1,16.41 ccw(c936.51,5) v2(920.37,5) ; v2(920.37,5) ccw(c920.37,-11.14) 908.96,0.27 cw(c920.37,-11.14) v2(920.37,5) ; 924,-38 1003,41 1127,41 1164,78 1164,107 1119,62 ; 924,-38 934,-28 934,5 ; v2(930,-17) cw(c893.79,-17) 919.39,-42.61 ccw(c893.79,-17) v2(930,-17) ; v2(930,-17) ccw(c930,-36.31) 916.34,-22.66 cw(c930,-36.31) v2(930,-17) ; v2(930,-17) cw(c973.46,-17) 942.73,13.73 ccw(c973.46,-17) v2(930,-17) ; v2(930,-17) cw(c947.89,-8.89) 934,5 ; v2(930,-17) ccw(c930,19.21) 955.61,-6.39 cw(c930,19.21) v2(930,-17) ; v2(930,-17) ccw(c930,-83.7) 882.83,-36.54 cw(c930,-83.7) v2(930,-17) ; v2(930,-17) cw(c947.89,-8.89) 934,5 ; 934,5 991,62 1014,62 ; 1014,62 1119,62 ; v2(1177,253) cw(c1227.7,202.3) 1227.7,274 ccw(c1227.7,202.3) v2(1177,253) ; v2(1177,253) cw(c1208.38,221.62) 1208.38,266 ccw(c1208.38,221.62) v2(1177,253) ; v2(1177,253) 1175,255 1175,274 1492,274 ; v2(1177,253) 1513,253 ; v2(1177,273) ccw(c1193.9,289.9) 1193.9,266 cw(c1193.9,289.9) v2(1177,273) ; v2(1177,273) ccw(c1225.28,321.28) 1225.28,253 cw(c1225.28,321.28) v2(1177,273) ; 1492,274 1514,274 1549,239 1578,210 1646,210 ; 1492,274 1513,253 ; 1513,253 1524,242 ; 1524,242 1544,222 2423,222 2434,233 ; 1646,210 2411,210 2434,233 ; v2(2207,218) cw(c2207,201.1) 2218.95,213.05 ccw(c2207,201.1) v2(2207,218) ; v2(2207,218) ccw(c2226.31,237.31) 2226.31,210 cw(c2226.31,237.31) v2(2207,218) ; v2(2207,218) cw(c2187.69,237.31) 2187.69,210 ccw(c2187.69,237.31) v2(2207,218) ; v2(2234,218) cw(c2246.07,205.93) 2246.07,223 ; v2(2234,218) ccw(c2282.28,218) 2248.14,183.86 cw(c2282.28,218) v2(2234,218) ; v2(2234,218) ccw(c2253.31,237.31) 2253.31,210 cw(c2253.31,237.31) v2(2234,218) ; v2(2234,218) cw(c2214.69,237.31) 2214.69,210 ccw(c2214.69,237.31) v2(2234,218) ; v2(2234,218) cw(c2246.07,205.93) 2246.07,223 ; v2(2234,218) cw(c2246.07,205.93) 2246.07,223 ; v2@2240,223 2234,223 2342,115 2354,103 v2(2354,13) ; v2@2240,223 2258,223 ; 2258,223 2404,223 2420,239 2433,252 2453,252 ; v2(2331,13) ccw(c2275.47,68.53) 2354,68.53 cw(c2275.47,68.53) v2(2331,13) ; v2(2331,13) v2(2354,13) ; v2(2354,13) cw(c2409.53,68.53) 2331,68.53 ccw(c2409.53,68.53) v2(2354,13) ; 2434,233 2444,243 ; 2444,243 2453,252 ; 2453,252 3135,252 ; v2(2694,246) cw(c2708.49,231.51) 2708.49,252 ccw(c2708.49,231.51) v2(2694,246) ; v2(2694,246) ccw(c2679.51,231.51) 2679.51,252 cw(c2679.51,231.51) v2(2694,246) ; v2(2715,246) cw(c2729.49,231.51) 2729.49,252 ccw(c2729.49,231.51) v2(2715,246) ; v2(2715,246) ccw(c2700.51,231.51) 2700.51,252 cw(c2700.51,231.51) v2(2715,246) ; v2(2935,246) cw(c2949.49,231.51) 2949.49,252 ccw(c2949.49,231.51) v2(2935,246) ; v2(2935,246) ccw(c2920.51,231.51) 2920.51,252 cw(c2920.51,231.51) v2(2935,246) ; v2(2957,246) cw(c2971.49,231.51) 2971.49,252 ccw(c2971.49,231.51) v2(2957,246) ; v2(2957,246) ccw(c2942.51,231.51) 2942.51,252 cw(c2942.51,231.51) v2(2957,246) ; 3135,252 3168,252 3135,252 ; v2(3149,246) cw(c3163.49,231.51) v2@3163.49,252 ; v2(3149,246) cw(c3163.49,231.51) v2@3163.49,252 ; v2(3149,246) ccw(c3134.51,231.51) 3134.51,252 cw(c3134.51,231.51) v2(3149,246) ; v2(3149,246) cw(c3163.49,231.51) v2@3163.49,252 ; v2(3149,246) cw(c3163.49,231.51) v2@3163.49,252 ; v2@3158.51,252 cw(c3158.51,231.51) v2(3173,246) ; v2@3158.51,252 cw(c3158.51,231.51) v2(3173,246) ; v2@3158.51,252 cw(c3158.51,231.51) v2(3173,246) ; v2@3158.51,252 cw(c3158.51,231.51) v2(3173,246) ; 1141.5,55.5 ccw(c1121.8,75.2) v2(1146,89) cw(c1121.8,75.2) 1141.5,55.5
  other v2: 1164,105
VS3: C8.1 C9.1 P3.5 P3.6 Q1.10 R6.2 U4.21 | length 4491.1
  Top Layer w7.87: U4.21@2250.79,-91.73 2411.73,-91.73 2549,-229 3033,-229 v2(3142,-120) ; Q1.10@3053.17,184.33 3053.17,122.83 ; C8.1@3081.87,-14.76 3081.87,45 3081.87,94.13 3053.17,122.83 ; 3053.17,122.83 ccw(c3037.79,122.83) 3045.08,136.37 cw(c3037.79,122.83) 3053.17,122.83 ; 3053.17,122.83 cw(c3068.54,122.83) 3061.25,136.37 ccw(c3068.54,122.83) 3053.17,122.83 ; v2@3081.87,16.95 ccw(c3108.58,16.95) 3089.7,-1.93 cw(c3108.58,16.95) v2@3081.87,16.95 ; v2@3081.87,16.95 cw(c3055.17,16.95) 3074.05,-1.93 ccw(c3055.17,16.95) v2@3081.87,16.95 ; 3128.56,-133.44 ccw(c3115.12,-120) 3134.13,-120 cw(c3115.12,-120) 3128.56,-133.44 ; 3128.56,-133.44 cw(c3142,-146.88) 3142,-127.87 ccw(c3142,-146.88) 3128.56,-133.44 ; Q1.10@3047.43,164.43 cw(c3033.59,150.59) 3053.17,150.59 ccw(c3033.59,150.59) Q1.10@3047.43,164.43 ; Q1.10@3048.43,185.43 cw(c3037,174) 3053.17,174 ccw(c3037,174) Q1.10@3048.43,185.43 ; Q1.10@3053.17,151.39 cw(c3071.61,151.39) 3058.57,164.43 ccw(c3071.61,151.39) Q1.10@3053.17,151.39 ; Q1.10@3053.17,169.98 cw(c3075.02,169.98) 3059.57,185.43 ccw(c3075.02,169.98) Q1.10@3053.17,169.98 ; 3070.53,105.47 cw(c3055.06,90) 3076.94,90 ccw(c3055.06,90) 3070.53,105.47 ; v2@3076.43,18.43 cw(c3063.29,5.29) 3081.87,5.29 ccw(c3063.29,5.29) v2@3076.43,18.43 ; v2@3076.43,29.57 ccw(c3063.29,42.71) 3081.87,42.71 cw(c3063.29,42.71) v2@3076.43,29.57 ; R6.2@3078.71,40.71 cw(c3071.08,33.08) 3081.87,33.08 ccw(c3071.08,33.08) R6.2@3078.71,40.71 ; R6.2@3078.71,49.29 ccw(c3071.08,56.92) 3081.87,56.92 cw(c3071.08,56.92) R6.2@3078.71,49.29 ; C9.1@3078.71,85.71 cw(c3071.08,78.08) 3081.87,78.08 ccw(c3071.08,78.08) C9.1@3078.71,85.71 ; C8.1@3081.87,4.69 cw(c3101.31,4.69) 3087.57,18.43 ccw(c3101.31,4.69) C8.1@3081.87,4.69 ; v2@3081.87,27.65 cw(c3100.35,27.65) 3087.29,40.71 ccw(c3100.35,27.65) v2@3081.87,27.65 ; R6.2@3081.87,43.31 ccw(c3101.31,43.31) 3087.57,29.57 cw(c3101.31,43.31) R6.2@3081.87,43.31 ; 3081.87,62.36 ccw(c3100.35,62.36) 3087.29,49.29 cw(c3100.35,62.36) 3081.87,62.36 ; 3081.87,72.64 cw(c3100.36,72.64) 3087.29,85.71 ccw(c3100.36,72.64) 3081.87,72.64
  Bottom Layer w7.87: 2791.11,-1.89 2836,43 2994,43 3054,103 v2(3054,191) ; 2802.79,17.79 2836,51 2993,51 3045,103 ; v2@3084,24 3144,-36 3144,-118 v2(3142,-120) ; v2@3054,171.99 ccw(c3034.99,171.99) 3048.43,185.43 cw(c3034.99,171.99) v2@3054,171.99 ; v2@3054,171.99 cw(c3073.01,171.99) 3059.57,185.43 ccw(c3073.01,171.99) v2@3054,171.99 ; v2(3054,191) cw(c3032.59,191) 3047.51,175.65 ccw(c3032.59,191) v2(3054,191) ; v2@3047.43,164.43 cw(c3031.58,148.58) 3054,148.58 ccw(c3031.58,148.58) v2@3047.43,164.43 ; 3054,153.4 cw(c3069.6,153.4) 3058.57,164.43 ccw(c3069.6,153.4) 3054,153.4 ; v2@3054,186.6 ccw(c3069.6,186.6) 3058.57,175.57 cw(c3069.6,186.6) v2@3054,186.6 ; v2@3082,16.13 cw(c3082,-7.71) 3098.86,9.14 ccw(c3082,-7.71) v2@3082,16.13 ; v2@3089.87,24 ccw(c3104.06,24) 3094.03,13.97 cw(c3104.06,24) v2@3089.87,24 ; v2@3136.43,-114.43 ccw(c3118.16,-96.16) 3144,-96.16 cw(c3118.16,-96.16) v2@3136.43,-114.43 ; 3144,-105.82 ccw(c3156.18,-105.82) 3147.57,-114.43 cw(c3156.18,-105.82) 3144,-105.82
  Bottom Layer w11.81: P3.6@2760,-1.89 2779,-1.89 ; P3.5@2760,17.79 2791,17.79 ; 2825.31,40.31 2828,43 3005,43 3060,98 3060,136 ; 2836,43 2791.11,-1.89 ; 2779,-1.89 2791.11,-1.89 ; 2779,-1.89 2791.11,-1.89 ; 2791,17.79 2802.79,17.79 ; 2791,17.79 2802.79,17.79 ; 2802.79,17.79 2836,51 2993,51 3045,103 3045,202 ; 3045,202 ccw(c3082.86,202) 3057.03,174.32 cw(c3082.86,202) 3045,202 ; 3045,202 3059,202 3060,201.59 3060,136 ; v2@3048.82,165.82 cw(c3021.84,138.84) 3060,138.84 ; v2@3048.82,165.82 cw(c3021.84,138.84) 3060,138.84 ; v2@3048.82,165.82 cw(c3021.84,138.84) 3060,138.84 ; v2@3048.82,165.82 cw(c3021.84,138.84) 3060,138.84 ; v2@3048.82,174.18 ccw(c3021.84,201.16) 3060,201.16 cw(c3021.84,201.16) v2@3048.82,174.18 ; v2@3048.84,174.19 ccw(c3022.22,201) v2@3060,201 ; v2@3048.84,174.19 ccw(c3022.22,201) v2@3060,201 ; v2@3049.82,186.82 cw(c3025.26,162.26) v2@3060,162.26 ; v2@3049.82,186.82 cw(c3025.26,162.26) v2@3060,162.26 ; v2@3049.82,186.82 cw(c3025.26,162.26) v2@3060,162.26 ; v2@3049.82,186.82 cw(c3025.26,162.26) v2@3060,162.26 ; 3060,136 v2@3060,201 ; 3045,136.43 cw(c3086.57,136.43) 3057.18,165.82 ccw(c3086.57,136.43) 3045,136.43 ; 3045,155.01 cw(c3089.99,155.01) 3058.18,186.82 ccw(c3089.99,155.01) 3045,155.01
  other v2: 3082,24 3053,170
pads on no net: P3.0 P3.0/2 U4.12 U4.13 U4.14 U4.15 U4.16 U4.17 U4.34 U4.35

## Polygon pours and split planes (outlines as drawn)
GND on Top Layer "Top Layer-No Net" (solid, remove dead copper, pour order 1000): -84,555 -84,-414 -50,-448 88,-586 4358,-586 4358,488 4463,593
GND on Bottom Layer "Top Layer-No Net" (solid, remove dead copper, pour order 1001): -104,458 -122,440 -122,-514 4571,-514 4628,-457 4645,-440 4645,592

## Keep-outs
Keep-Out Layer:
  lines w3.94: 3708.08,-293.3 1745.79,-293.3 1745.79,-268.67 ccw(c1730.9,-268.67) 1730.9,-253.77 1615.37,-253.77 ccw(c1615.4,-269.32) 1599.85,-269.29 1599.85,-293.25 696,-293.25 696,-258.77 ccw(c672.98,-266.47) 649.96,-258.77 649.96,-293.25 486.21,-293.25 486.21,-271.91 ccw(c469.32,-271.91) 469.32,-255.02 355.82,-255.02 ccw(c355.82,-270.05) 340.79,-270.05 340.79,-293.25 270.72,-293.25 cw(c270.72,-278.75) 256.21,-278.75 256.21,-138.74 ccw(c241.97,-138.74) 241.97,-124.5 9.34,-124.5 -2.43,-112.73 -2.43,128.15 7.83,138.41 221.84,138.41 ccw(c221.84,150.5) 233.92,150.5 233.92,294.25 340.79,294.25 340.79,266.98 ccw(c352.69,266.98) 352.69,255.08 469.79,255.08 ccw(c469.79,271.08) 485.79,271.08 485.79,294.14 1600.38,294.14 1600.38,271.56 ccw(c1614.77,271.56) 1614.77,257.16 1733.77,257.16 ccw(c1733.77,268.35) 1744.96,268.35 1744.96,294.25 3724.95,294.25 cw(c3692.04,-53.42) 3832.45,266.33 ccw(c3910.73,520.73) 3903.29,254.66 3965.86,254.66 cw(c3965.86,238.48) 3982.04,238.48 3982.04,209.02 ccw(c3994.41,209.02) 3994.41,196.64 4298.6,196.64 4315.11,180.13 4315.11,-176.74 cw(c4291.6,-169.92) 4293.91,-194.29 4189.12,-194.29 4189.12,-148.67 ccw(c4169.43,-153) 4149.75,-148.67 4149.75,-194.08 3999.33,-194.08 ccw(c3999.33,-210.33) 3983.08,-210.33 3983.08,-231.79 cw(c3958.35,-227.78) 3955.16,-252.63 3892.04,-253.67 ; 3709.08,-293.3 ccw(c3707.34,-133.03) 3755.33,-285.96 3827,-266.38 cw(c3923.68,-590.85) 3893.04,-253.67

## Other copper
Top Layer:
  rectangle net GND: 1994,242 2054.56,277
  rectangle net GND: 2415,70.12 2497,109
  pour cut-out: 2057.32,294.25 2057,293.93 2057,234 2008,234 2004,230 2004,133 2012,125 2406,125 2416.28,135.28 2490.72,135.28 2497,129 2497,37 2515,19 3167,19 3190,42 3190,293.53 3189.28,294.25

## Silkscreen, mask and mechanical layers (free items; w line width, h text height)
Top Overlay:
  lines w1.97: 2063.04,615.23 2064.22,616.01
Bottom Overlay:
  drawing of 23 lines, arcs and shapes, not listed
  text "20240317" at 4030,11 h39.37
  text "LKS_074DO_V1.0" at 4160,-65 h39.37
Mechanical 15:
  lines w3.94: 4118,-307 4143,-282 4143,266
  lines w5: -92,0 9050,0 ; 1250,220 5495,220 ; 2813,-588 2813,552 ; 3590,-390 3590,310